# Altium PCB ir_distance_display.PcbDoc
Units mil, origin at the board's own origin, x right, y up, seen from the top; angles counter-clockwise.
Board outline 6000 x 4000 mil, 2 copper layers (Top Layer, Bottom Layer); 19 components, 17 nets, 52 pads, 0 vias.
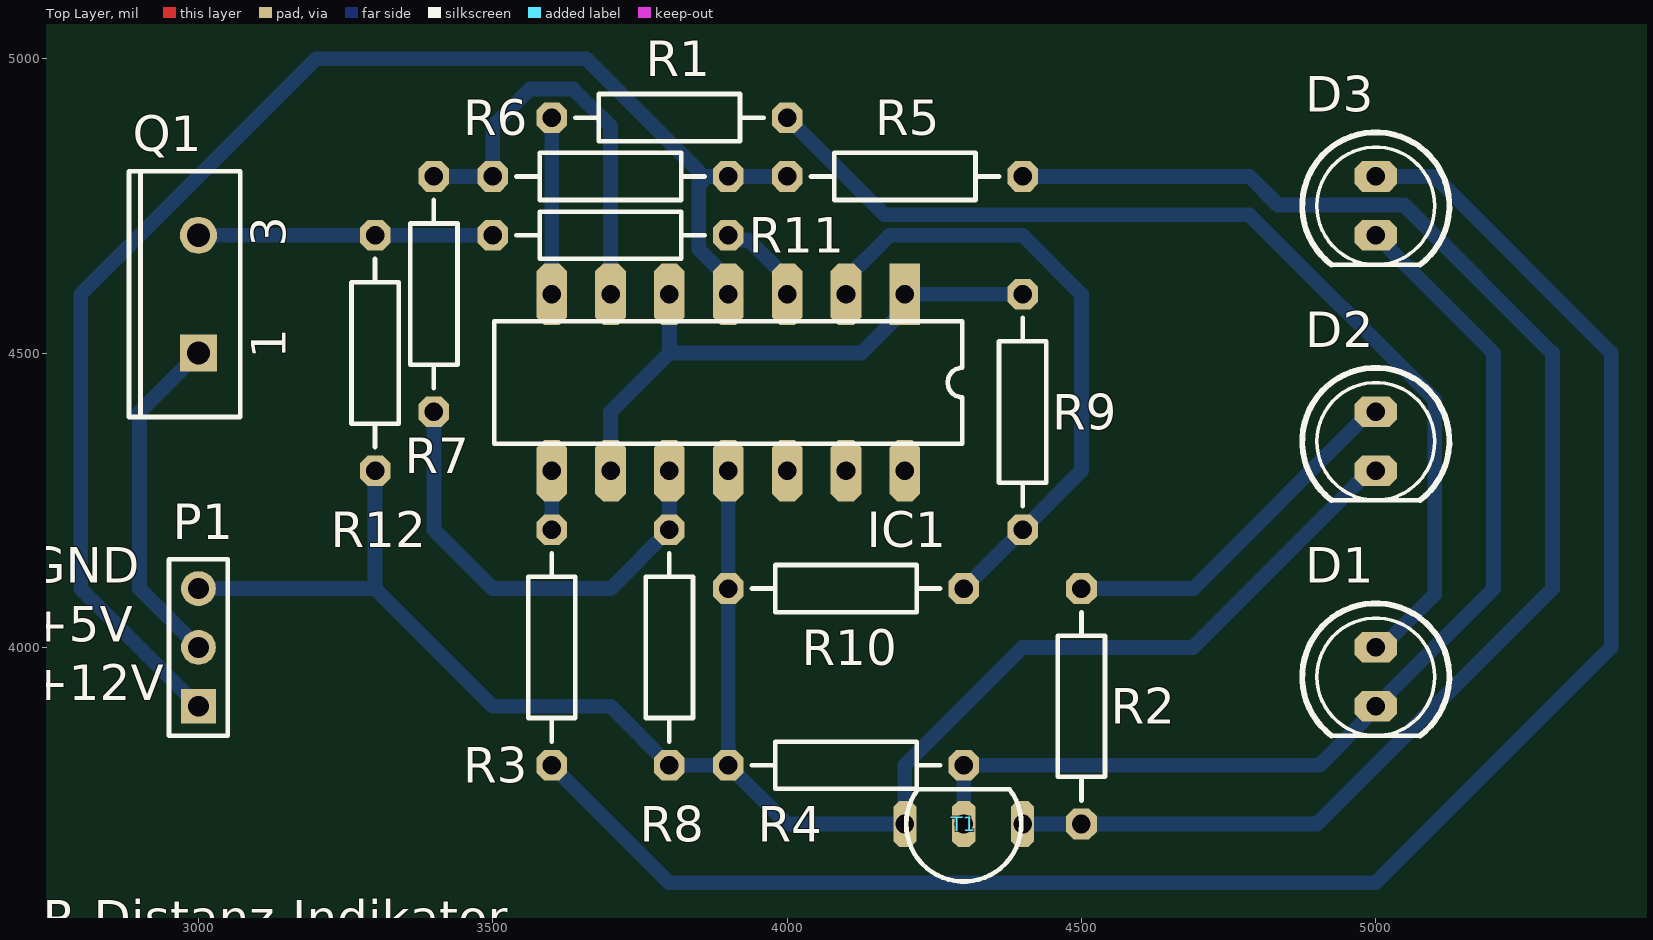
[diagram p0: Top Layer view]
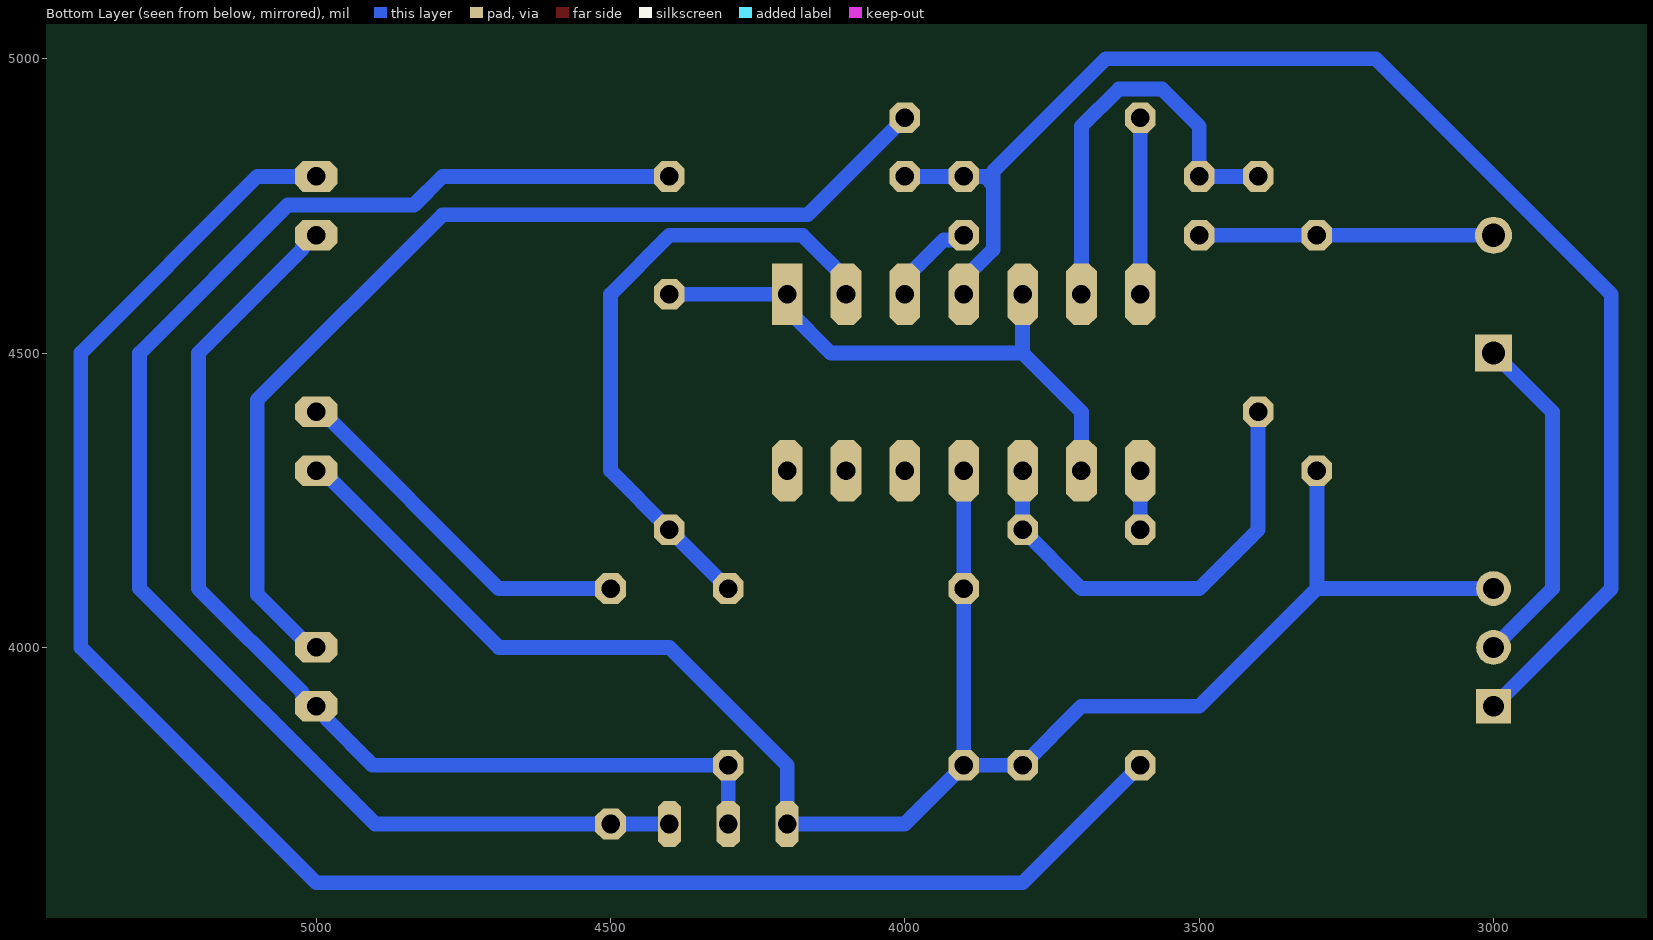
[diagram p1: Bottom Layer view, seen from below]
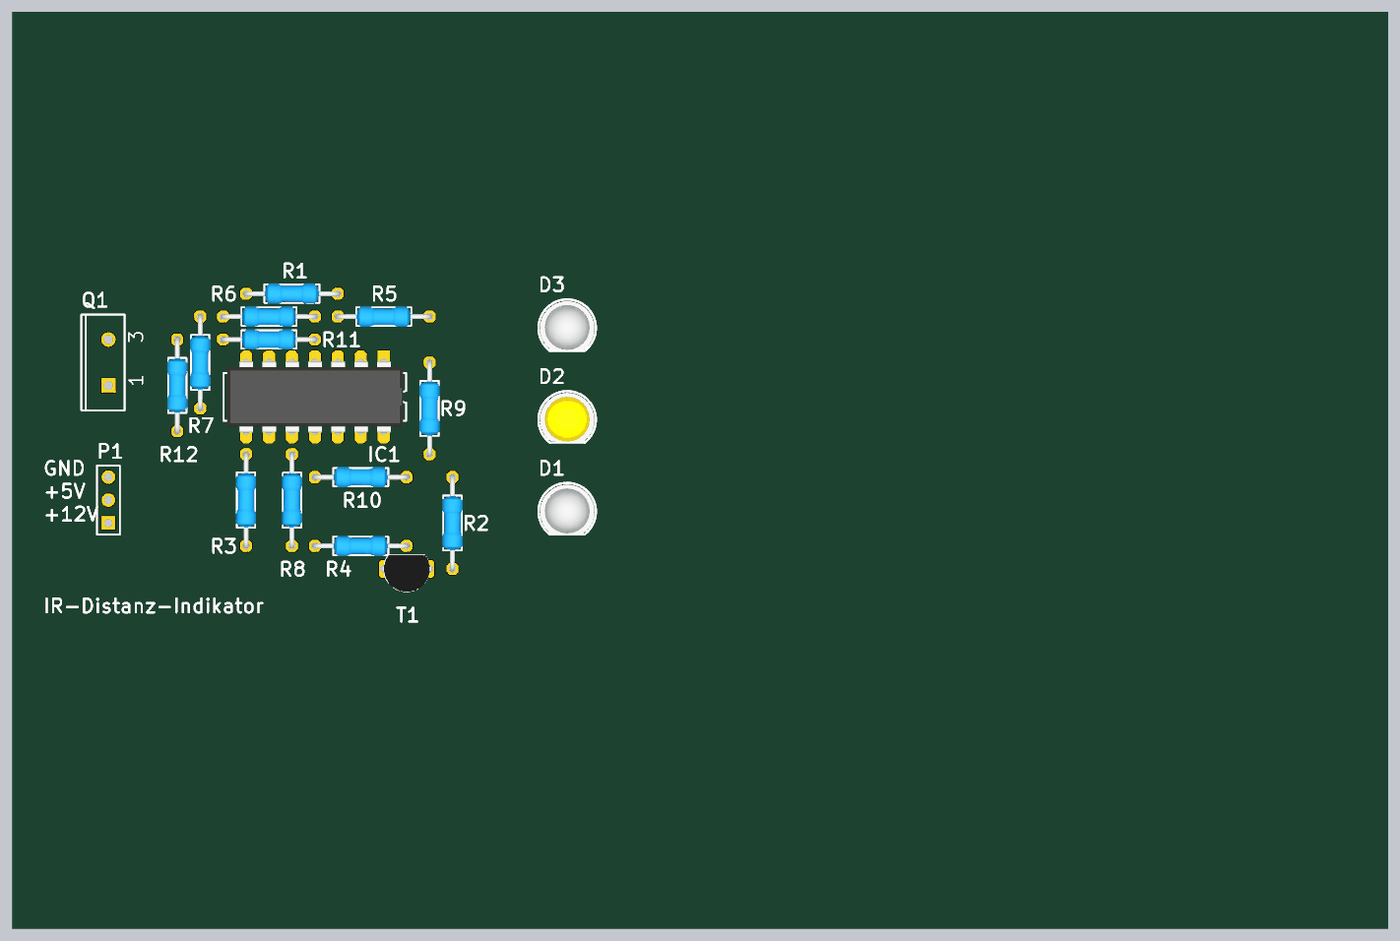
[diagram p2: 3D render of the assembled board from above, using the file's embedded part models]

## Layer stack, top to bottom
Top Solder: solder mask 0.4, Solder Resist, Dk 3.5
Top Layer: signal copper 1.4
Dielectric1: dielectric 12.6, FR-4, Dk 4.8
Bottom Layer: signal copper 1.4
Bottom Solder: solder mask 0.4, Solder Resist, Dk 3.5

## Board outline
2580,2130 2580,6130 8580,6130 8580,2130

## Design rules (kind name [scope] priority, off if disabled: settings)
Clearance "Text (Polygon)" [inPolygon vs isText] p1: gap=0 ignorepadtopadclearanceinfootprint=FALSE
Clearance "Masseflaeche (Polygon)" [All vs inPolygon] p2: gap=20 ignorepadtopadclearanceinfootprint=FALSE except(0: Arc-Hole Track-Hole SMDPad-Hole THPad-Hole Via-Hole Fill-Hole Poly-Hole Region-Hole Text-Hole)
Clearance "Abstand (Clearance)" [All] p3: gap=10 ignorepadtopadclearanceinfootprint=FALSE except(0: Arc-Hole Track-Hole SMDPad-Hole THPad-Hole Via-Hole Fill-Hole Poly-Hole Region-Hole Text-Hole)
DiffPairsRouting [All] p1: maxlimit=15 minlimit=12 mostfreqgap=12 toplayer_minwidth=15 toplayer_maxwidth=15 toplayer_prefwidth=15 bottomlayer_minwidth=15 bottomlayer_maxwidth=15 bottomlayer_prefwidth=15 maxuncoupledlength=500
FabricationTestPointUsage TestPointUsage [All] p1: valid=0 allowmultiple=FALSE
FabricationTestpoint Testpoint [All] p1: side=3 testpointundercomponent=TRUE minsize=40 maxsize=100 preferedsize=60 minholesize=0 maxholesize=40 preferedholesize=32 testpointgrid=1 allowsidetop=TRUE allowsidebottom=TRUE usegrid=TRUE gridtolerance=0.01
HoleSize [All] p1: absolutevalues=TRUE maxlimit=100 minlimit=28 maxpercent=80.000 minpercent=20.000
HoleToHoleClearance [All] p1: gap=10 allowstackedmicrovias=FALSE
PlaneConnect [All] p1: planeconnectstyle=Relief reliefexpansion=20 reliefentries=4 reliefconductorwidth=32 reliefairgap=10
PolygonConnect [All] p1: connectstyle=Relief reliefconductorwidth=32 reliefentries=4 polygonreliefangle="90 Angle" airgapwidth=10
RoomDefinition ir_distance_display [InComponentClass('ir_distance_display')] p1: confinementstyle=ConfineIn formatcopy=TRUE lockcomponents=FALSE outline 2800,2300 8400,2300 8400,5900 2800,5900
RoutingVias [All] p1: holewidth=28 width=50 viastyle="Through Hole" minholewidth=28 minwidth=50 maxholewidth=28 maxwidth=50
SMDEntry [All] p1: side=TRUE corner=TRUE anyangle=FALSE
SilkToSilkClearance [All] p1 off: silktosilkclearance=10
SilkToSolderMaskClearance SilkscreenOverComponentPads [IsPad] p1 off: minsilkscreentomaskgap=10 clearancetoexposedcopper=TRUE
SolderMaskExpansion [All] p1: expansion=4 istentingtop=FALSE
UnRoutedNet [All] p1: checkbadconnections=TRUE
Width [All] p1: maxlimit=200 minlimit=11 preferedwidth=25 minimp=50.000000 maximp=50.000000 favimp=50.000000
21 further rules are at their usual default settings.

## Components (designator, comment, footprint, x,y, rotation, side; value= is the part's Value field where it differs from the comment)
D1 "LED GREEN" "LED_5MM - green" 5000,4000 r270 top
D2 "LED YELLOW" "LED_5MM - yellow" 5000,4400 r270 top
D3 "LED RED" "LED_5MM - red" 5000,4800 r270 top
IC1 "LM324" DIP14 4200,4600 r180 top
P1 "Header 3" HDR1X3 3000,3900 r90 top
Q1 "Photo NPN" TO-220_A 3000,4600 r90 top
R1 "330" R_0207/RM4 3800,4900 r0 top
R2 "330" R_0207/RM4 4500,3900 r90 top
R3 "330" R_0207/RM4 3600,4000 r270 top
R4 "1K" R_0207/RM4 4100,3800 r0 top
R5 "1K" R_0207/RM4 4200,4800 r0 top
R6 "33" R_0207/RM4 3700,4800 r0 top
R7 "220" R_0207/RM4 3400,4600 r90 top
R8 "56" R_0207/RM4 3800,4000 r90 top
R9 "100K" R_0207/RM4 4400,4400 r270 top
R10 "1.5K" R_0207/RM4 4100,4100 r0 top
R11 "1.5K" R_0207/RM4 3700,4700 r180 top
R12 "100" R_0207/RM4 3300,4500 r90 top
T1 "BC547A" TO-92A-2 4400,3700 r90 top

## Footprints (in the part's own frame and the unit in brackets; to place one, negate y for a bottom-side part, rotate by r counter-clockwise, add the part's x,y. Pads: shape width x height; smd on the part's side, far side on the other; paste and mask are expansions set on the pad)
DIP14 [mil] "DIP; 14 Leads; Row Spacing 7.62 mm; Pitch 2.54 mm"
  rect 52x104 hole 31.5: 1(0,0)
  oct 52x104 hole 31.5: 2(100,0) 3(200,0) 4(300,0) 5(400,0) 6(500,0) 7(600,0) 8(600,300) 9(500,300) 10(400,300) 11(300,300) 12(200,300) 13(100,300) 14(0,300)
  silkscreen extent -98,46 698,254, body extent -85,-5 683,305, height 200
HDR1X3 [mm] "Connector; Header; 3 Position"
  rect 1.5x1.5 hole 0.9: 1(0,0)
  round 1.5 hole 0.9: 2(2.54,0) 3(5.08,0)
  silkscreen extent -1.27,-1.27 6.35,1.27
"LED_5MM - green" [mil] "LED 5mm"
  oct 52x72 hole 31.5: A(0,0) K(100,0)
  silkscreen extent -75,-125 150,125, body extent -67,-118 146,118, height 485
"LED_5MM - red" [mil] "LED 5mm"
  oct 52x72 hole 31.5: A(0,0) K(100,0)
  silkscreen extent -75,-125 150,125, body extent -67,-118 146,118, height 485
"LED_5MM - yellow" [mil] "LED 5mm"
  oct 52x72 hole 31.5: A(0,0) K(100,0)
  silkscreen extent -75,-125 150,125, body extent -67,-118 146,118, height 485
R_0207/RM4 [mil] "type 0207, RM4"
  oct 52x52 hole 31.5: 1(-200,0) 2(200,0)
  silkscreen extent -160,-40 160,40, body extent -211,-44 211,44, height 94
TO-92A-2 [mm] "TO, Flat Index; 3 In-Line, Axial Leads; Body Dia. 4.5mm; Leads 0.51 x 0.48 mm (max)"
  oct 2x1 hole 0.8: 1(0,0) 2(0,2.54) 3(0,5.08)
  silkscreen extent -2.48,0.06 1.5,5.02, body extent -2.54,-0.25 1.54,5.28, height 7.24
TO-220_A [mm] "TO, Thru-Hole, Vertical, Heatsink Mounted; 3 In-Line Leads (1 Absent); Pitch 2.54 mm"
  rect 1.6x1.6 hole 1: 1(-2.54,0)
  round 1.6 hole 1: 3(2.54,0)
  silkscreen extent -5.3,-1.8 5.3,3

## Part data
D1: library part LED_GREEN, "Green GaAs LED (Vf=2.1V, If=40mA)", LatestRevisionDate=01-Nov-2013, Published=21-Feb-2011, SimulationModellSource="Miscellaneous Devices", Usage="only permitted for non-commercial purposes at HTL I Innsbruck"
D2: library part LED_YELLOW, "Yellow GaAs LED (Vf=2.1V, If=40mA)", LatestRevisionDate=01-Nov-2013, Published=21-Feb-2011, SimulationModellSource="Miscellaneous Devices", Usage="only permitted for non-commercial purposes at HTL I Innsbruck"
D3: library part LED_RED, "Red GaAs LED (Vf=1.7V, If=40mA)", LatestRevisionDate=01-Nov-2013, Published=21-Feb-2011, SimulationModellSource="Miscellaneous Devices", Usage="only permitted for non-commercial purposes at HTL I Innsbruck"
IC1: "Low-Power Quad Operational Amplifier", LatestRevisionDate=31-Oct-2012, Published=21-Feb-2011, Publisher="Michael Kupfner", SimulationModellSource="ST Operational Amplifier", Usage="only permitted for non-commercial purposes at HTL I Innsbruck"
P1: "Header, 3-Pin", LatestRevisionDate=17-Jul-2002, LatestRevisionNote="Re-released for DXP Platform.", Publisher="Altium Limited"
Q1: "NPN Phototransistor", Code_JEDEC=TO-220-AC, LatestRevisionDate=17-Jul-2002, LatestRevisionNote="Re-released for DXP Platform.", PackageReference=TO-220_A, Published=24-Mar-1999, Publisher="Altium Limited"
R1 R2 R3 R4 R5 R6 R7 R8 R9 R10 R11 R12: library part R, "Resistor", LatestRevisionDate=07-Sep-2019, Published=21-Feb-2011, Usage="only permitted for non-commercial purposes at HTL I Innsbruck"
T1: "NPN General-purpose Transistor", LatestRevisionDate=31-Oct-2012, Published=21-Feb-2011, SimulationModellSource="Philips Discrete BJT - Low Power", Usage="only permitted for non-commercial purposes at HTL I Innsbruck"

## Nets (pads, with @x,y where several pads share a name; then routed paths per layer and width w, separated by ;. In a path a pad name is that pad's centre, name@x,y a point inside that pad or via, vN(x,y) a via of type N, cw(c..) or ccw(c..) an arc to the next point about the centre after c; other vN are vias at no path point)
+5: P1.2 Q1.1 | length 582.8
  Bottom Layer w25: P1.2 2900,4100 2900,4400 Q1.1
+12: IC1.4 P1.1 R5.1 R6.2 | length 2463.2
  Bottom Layer w25: P1.1 2800,4100 2800,4600 3200,5000 3658.68,5000 3850.02,4808.66 3850.02,4785.36 ; IC1.4 3900,4626 3850.02,4675.98 3850.02,4785.36 ; R5.1 R6.2 3864.66,4800 3850.02,4785.36
GND: D2.K IC1.11 P1.3 R4.1 R8.1 R10.1 R12.1 T1.3 | length 3172.8
  Bottom Layer w25: P1.3 3300,4100 ; R12.1 3300,4100 ; IC1.11 R10.1 3900,4000 R4.1 ; D2.K 4990,4300 4690,4000 4400,4000 4200,3800 T1.3 4000,3700 R4.1 ; 3300,4100 3500,3900 3700,3900 R8.1 R4.1
NetD1_A: D1.A R1.2 | length 1766.3
  Bottom Layer w25: R1.2 4165,4735 4785.36,4735 5100,4420.36 5100,4090 5010,4000 D1.A
NetD1_K: D1.K D3.K R4.2 T1.2 | length 1817.2
  Bottom Layer w25: T1.2 R4.2 4904.32,3800 4982.18,3877.86 4982.18,3886.5 4995.68,3900 5004.32,3900 5023.5,3919.18 5023.5,3923.5 5200,4100 5200,4500 5023.5,4676.5 5023.5,4680.82 5004.32,4700 D3.K
NetD2_A: D2.A R2.2 | length 624.3
  Bottom Layer w25: R2.2 4690,4100 4990,4400 D2.A
NetD3_A: D3.A R3.2 | length 3072.8
  Bottom Layer w25: R3.2 3800,3600 5000,3600 5400,4000 5400,4500 5100,4800 D3.A
NetD4_K: 
NetIC1_1: IC1.1 IC1.5 IC1.9 R9.1 | length 998.1
  Bottom Layer w25: IC1.9 3700,4400 3800,4500 ; IC1.5 3800,4500 ; R9.1 IC1.1 4200,4574 4126,4500 3800,4500
NetIC1_2: IC1.2 R9.2 R10.2 | length 1080.9
  Bottom Layer w25: IC1.2 4100,4626 4174,4700 4400,4700 4500,4600 4500,4300 R9.2 R10.2
NetIC1_3: IC1.3 R11.1 | length 156.7
  Bottom Layer w25: R11.1 3907.82,4692.18 3933.82,4692.18 4000,4626 IC1.3
NetIC1_6: IC1.6 R6.1 R7.2 | length 723
  Bottom Layer w25: R7.2 R6.1 3500,4885.36 3563.14,4948.5 3636.86,4948.5 3700,4885.36 IC1.6
NetIC1_7: IC1.7 R1.1 | length 300
  Bottom Layer w25: IC1.7 R1.1
NetIC1_8: IC1.8 R3.1 | length 100
  Bottom Layer w25: R3.1 IC1.8
NetIC1_10: IC1.10 R7.1 R8.2 | length 782.8
  Bottom Layer w25: R7.1 3400,4200 3500,4100 3700,4100 R8.2 IC1.10
NetQ1_3: Q1.3 R11.2 R12.2 | length 500
  Bottom Layer w25: Q1.3 R12.2 R11.2
NetR2_1: R2.1 R5.2 T1.1 | length 2489.9
  Bottom Layer w25: T1.1 R2.1 4900,3700 5300,4100 5300,4500 5048.5,4751.5 4833.86,4751.5 4785.36,4800 R5.2
pads on no net: IC1.12 IC1.13 IC1.14

## Other copper
Top Layer:
  text "LAYOUT TOP" at 10300,880 h70
  text "2" at 10300,280 h70
Bottom Layer:
  text "LAYOUT BOTTOM" at 10300,880 h70
  text "3" at 10300,280 h70

## Silkscreen, mask and mechanical layers (free items; w line width, h text height)
Top Overlay:
  text "GND" at 2710,4110 h60
  text "+5V" at 2710,4010 h60
  text "+12V" at 2710,3910 h60
  text "IR-Distanz-Indikator" at 2710,3510 h60
  text "BESTUECK. TOP" at 10300,880 h70
  text "4" at 10300,280 h70
Bottom Overlay:
  text "BESTUECK. BOTTOM" at 10300,880 h70
  text "5" at 10300,280 h70
Mechanical 16 (Blatt-Beschriftung):
  drawing of 350 lines, arcs and shapes, not listed
  text "1" at 1427,7465 h70
  text "2" at 4287,7465 h70
  text "3" at 7167,7465 h70
  text "4" at 10037,7465 h70
  text "A" at 75,6559 h70
  text "A" at 11375,6559 h70
  text "B" at 75,4667 h70
  text "B" at 11375,4667 h70
  text "C" at 75,2757 h70
  text "C" at 11375,2757 h70
  text "TITEL:" at 6850,1300 h45
  text "IR-DISTANZ-INDIKATOR" at 6900,1180 h70
  text "NAME:" at 6850,1000 h45
  text "GRUPPE:" at 8350,1000 h45
  text "KLASSE:" at 9180,1000 h45
  text "DOKUMENTENART:" at 10250,1000 h45
  text "Hannah Purner, Philipp Dona" at 6900,880 h70
  text "5" at 8400,880 h70
  text "3AHEL" at 9230,880 h70
  text "D" at 75,867 h70
  text "D" at 11375,867 h70
  text "DATUM:" at 6850,700 h45
  text "REVISION:" at 8350,700 h45
  text "MASZSTAB:" at 9180,700 h45
  text "DOKUMENTENSTATUS:" at 10250,700 h45
  text "HTBLVA" at 5550,600 h70
  text ".PRINT_DATE" at 6900,580 h70
  text "0.1" at 8400,580 h70
  text ".Print_Scale" at 9230,580 h70
  text "ENTWURF" at 10300,580 h70
  text "Abt. Elektronik" at 5550,500 h70
  text "Anichstrasse 26-28" at 5550,400 h70
  text "SACHNUMMER/DATEINAME:" at 6850,400 h45
  text "BLATT:" at 10250,400 h45
  text "BLAETTER:" at 10800,400 h45
  text "A-6020 Innsbruck" at 5550,300 h70
  text ".PCB_FILE_NAME_NO_PATH" at 6900,280 h70
  text "6" at 10850,280 h70
  text "1" at 1427,65 h70
  text "2" at 4287,65 h70
  text "3" at 7167,65 h70
  text "4" at 10037,65 h70
Drill Drawing:
  text ".LEGEND" at 4700,1800 h60
  text "BOHRPLAN" at 10300,880 h70
  text "6" at 10300,280 h70

## Text inside footprints (layer, text, board x,y; h text height)
Q1: Top Overlay "3" at 3148.62,4680.31 h59.06 r90; Top Overlay "1" at 3148.62,4490.16 h59.06 r90